# Altium PCB disp4x7seg.PcbDoc
Units mil, origin at the board's own origin, x right, y up, seen from the top; angles counter-clockwise.
Board outline 1200 x 600 mil, 2 copper layers (Top Layer, Bottom Layer), stack 65.792 mil thick; 6 components, 12 nets, 52 pads, 0 vias.
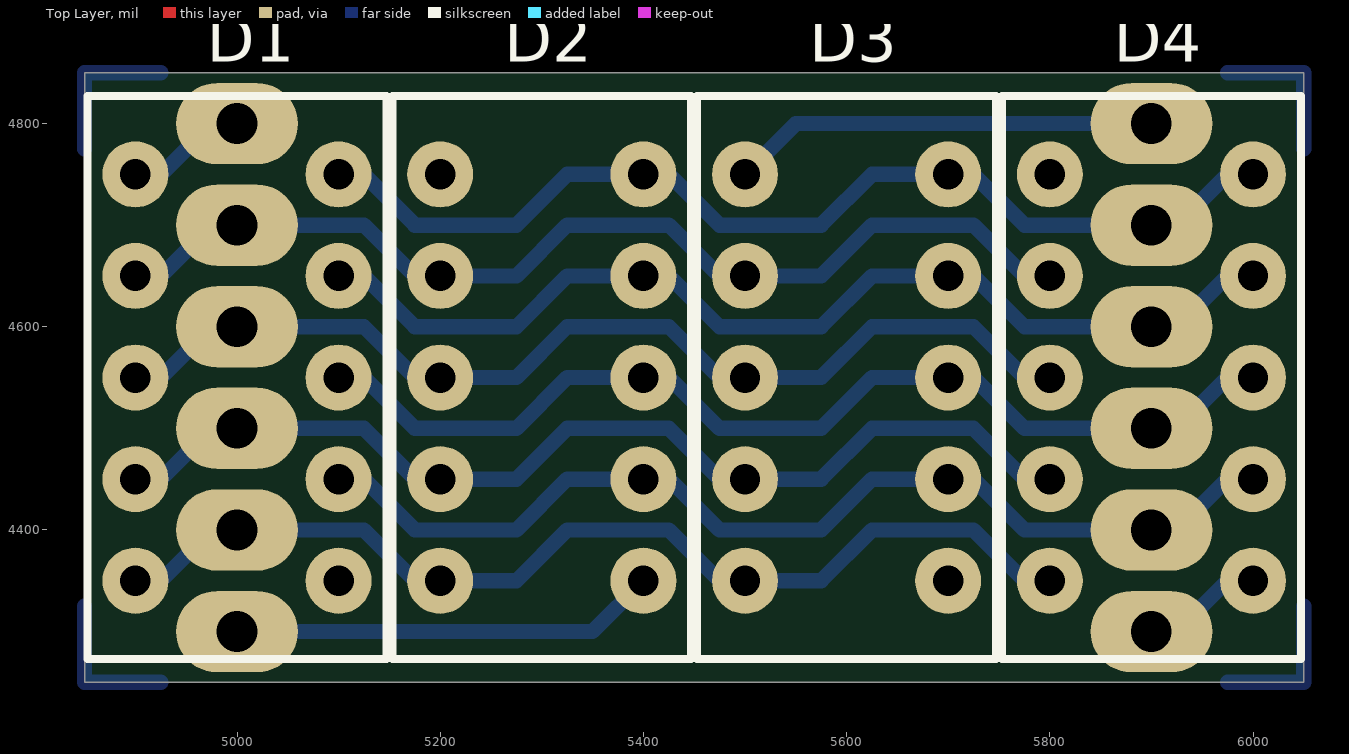
[diagram p0: Top Layer view]
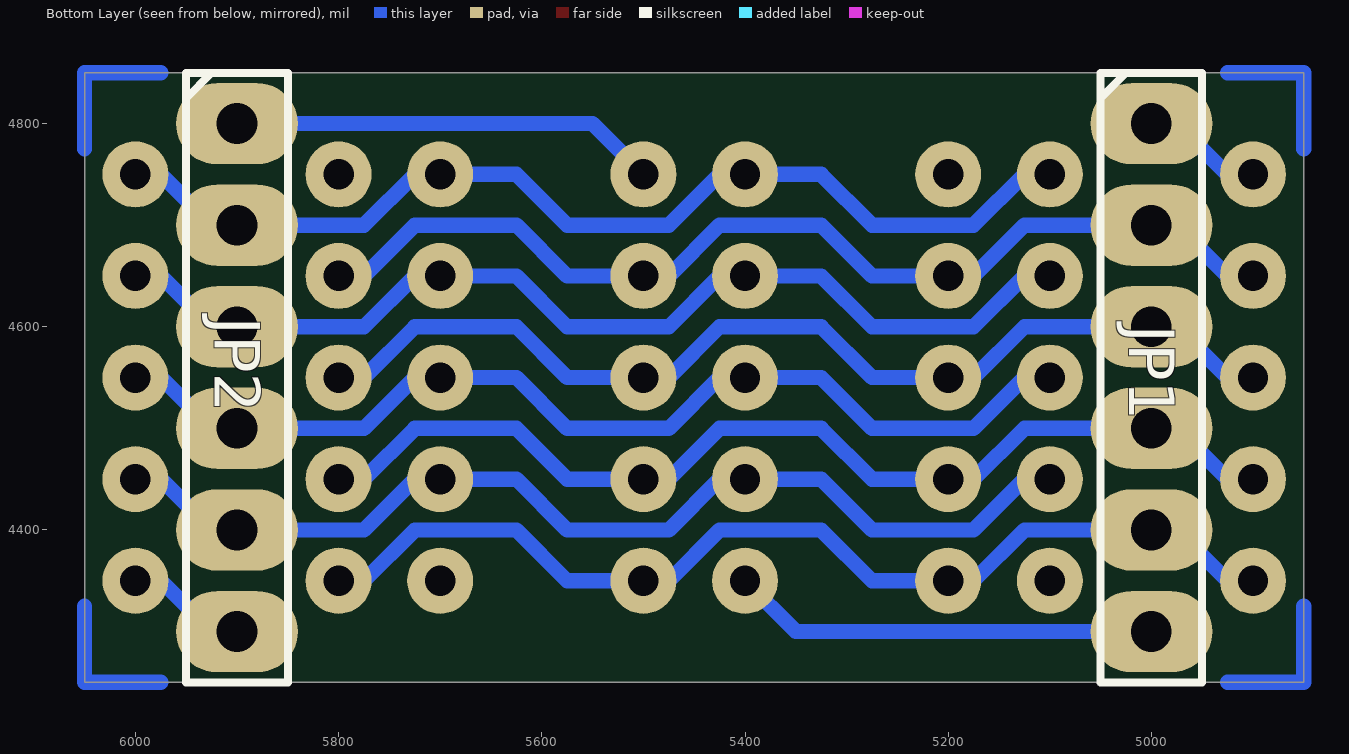
[diagram p1: Bottom Layer view, seen from below]
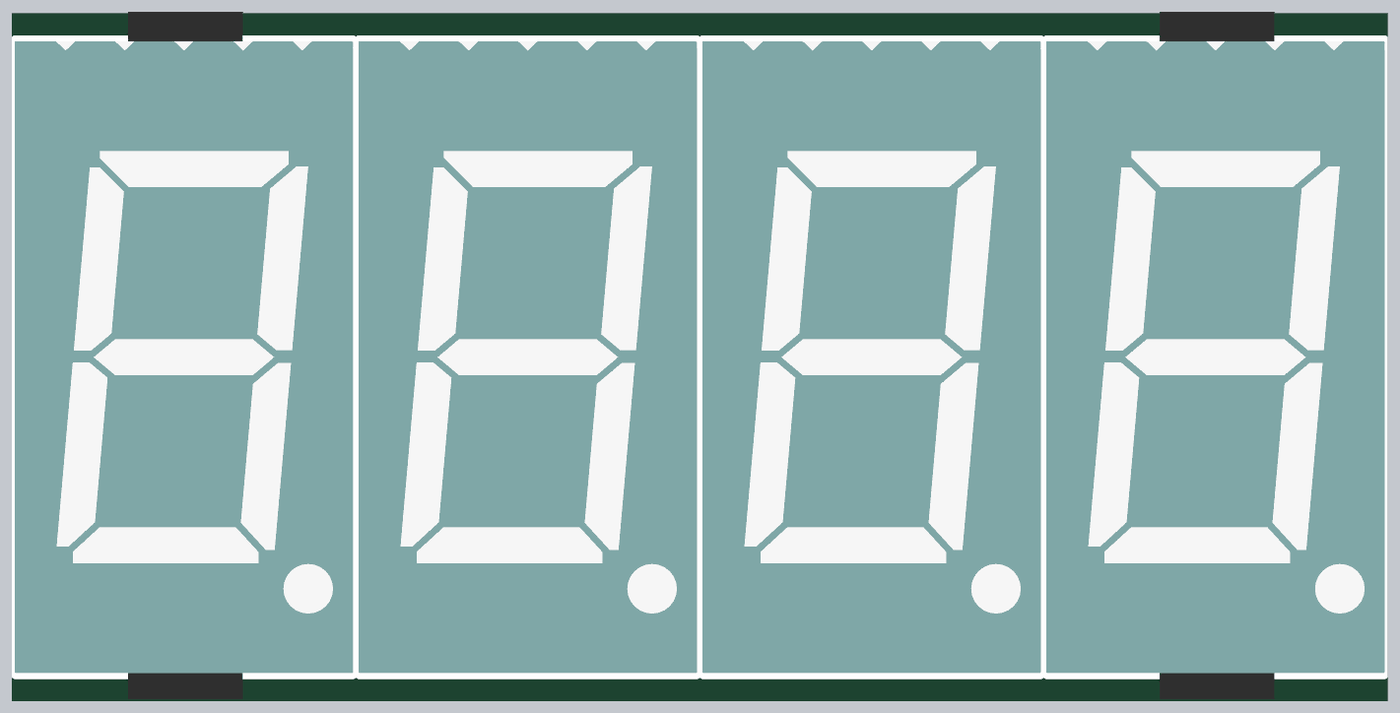
[diagram p2: 3D render of the assembled board from above, using the file's embedded part models]

## Layer stack, top to bottom
Top Layer: signal copper 1.4
Dielectric: core 62.9921, FR-4, Dk 4.8
Bottom Layer: signal copper 1.4

## Board outline
4850,4250 6050,4250 6050,4850 4850,4850

## Design rules (kind name [scope] priority, off if disabled: settings)
Clearance [All] p1: gap=10
PolygonConnect [All] p1: connectstyle=Relief reliefconductorwidth=10 reliefentries=4 polygonreliefangle="90 Angle"
RoutingVias [All] p1: holewidth=28 width=50 viastyle="Through Hole" minholewidth=28 minwidth=50 maxholewidth=28 maxwidth=50
SilkscreenOverComponentPads [All] p1: minsilkscreentomaskgap=10
SolderMaskExpansion [All] p1: expansion=4
Width [All] p1: maxlimit=15 minlimit=10 preferedwidth=10
27 further rules are at their usual default settings.

## Components (designator, comment, footprint, x,y, rotation, side; value= is the part's Value field where it differs from the comment)
D1 "DA361H" DISP7_2 5200,4550 r0 top
D2 "DA361H" DISP7_2 5500,4550 r0 top
D3 "DA361H" DISP7_2 5800,4550 r0 top
D4 "DA361H" DISP7_2 6100,4550 r0 top
JP1 "Header6x1" HDR6X1 5000,4800 r270 bottom
JP2 "Header6x1" HDR6X1 5900,4800 r270 bottom

## Footprints (in the part's own frame and the unit in brackets; to place one, negate y for a bottom-side part, rotate by r counter-clockwise, add the part's x,y. Pads: shape width x height; smd on the part's side, far side on the other; paste and mask are expansions set on the pad)
DISP7_2 [mil] "DISPLAY 7 SEGMENTOS"
  round 65 hole 30: 1(-300,200) 2(-300,100) 3(-300,0) 4(-300,-100) 5(-300,-200) 6(-100,-200) 7(-100,-100) 8(-100,0) 9(-100,100) 10(-100,200)
  silkscreen extent -347,-277 -53,277, body extent -348,-276 -52,276, height 401
HDR6X1 [mil] "HEADER 6x1"
  oval 80x120 hole 40: 1(0,0) 2(100,0) 3(200,0) 4(300,0) 5(400,0) 6(500,0)
  silkscreen extent -50,-50 550,50, body extent -51,-51 549,49, height 161

## Part data
D1 D2 D3 D4: library part "Display 7 Segmentos Rojo; Anodo Comun; 0.36in; DA361H"
JP1 JP2: "Header 6x1"

## Nets (pads, with @x,y where several pads share a name; then routed paths per layer and width w, separated by ;. In a path a pad name is that pad's centre, name@x,y a point inside that pad or via, vN(x,y) a via of type N, cw(c..) or ccw(c..) an arc to the next point about the centre after c; other vN are vias at no path point)
A: D1.10 D2.10 D3.10 D4.10 JP2.2 | length 1149.3
  Bottom Layer w15: D1.10 5125,4750 5175,4700 5275,4700 5325,4750 D2.10 5425,4750 5475,4700 5575,4700 5625,4750 D3.10 5725,4750 5775,4700 ; D4.10 5975,4750 5925,4700 JP2.2 5875,4700 5775,4700 ; 5775,4700 5837.5,4700 5775,4700
A0: D4.6 JP2.6 | length 145.7
  Bottom Layer w15: JP2.6@5875,4300 JP2.6 5925,4300 5975,4350 D4.6
A1: D3.1 JP2.1 | length 420.7
  Bottom Layer w15: D3.1 5550,4800 JP2.1
A2: D2.6 JP1.6 | length 420.7
  Bottom Layer w15: JP1.6 5350,4300 D2.6
A3: D1.1 JP1.1 | length 145.7
  Bottom Layer w15: D1.1 4925,4750 4975,4800 JP1.1 JP1.1@5025,4800
B: D1.9 D2.9 D3.9 D4.9 JP2.3 | length 1149.3
  Bottom Layer w15: D1.9 5125,4650 5175,4600 5275,4600 5325,4650 D2.9 5425,4650 5475,4600 5575,4600 5625,4650 D3.9 5725,4650 5775,4600 ; D4.9 5975,4650 5925,4600 JP2.3 5875,4600 5775,4600 ; 5775,4600 5837.5,4600 5775,4600
C: D1.8 D2.8 D3.8 D4.8 JP2.4 | length 1124.3
  Bottom Layer w15: D1.8 5125,4550 5175,4500 5275,4500 5325,4550 D2.8 ; D2.8@5425,4550 5475,4500 5575,4500 5625,4550 D3.8 5725,4550 5775,4500 ; D4.8 5975,4550 5925,4500 JP2.4 5875,4500 5775,4500 ; 5775,4500 5837.5,4500 5775,4500
D: D1.5 D2.5 D3.5 D4.5 JP1.5 | length 1124.3
  Bottom Layer w15: D1.5 4925,4350 4975,4400 JP1.5 5025,4400 5125,4400 ; 5062.5,4400 5125,4400 ; D4.5@5787.5,4350 D4.5 ; 5125,4400 5175,4350 D2.5 5275,4350 5325,4400 5425,4400 5475,4350 D3.5 5575,4350 5625,4400 5725,4400 D4.5@5775,4350 ; D4.5@5775,4350 D4.5 ; D4.5@5775,4350 D4.5
DP: D1.7 D2.7 D3.7 D4.7 JP2.5 | length 1149.3
  Bottom Layer w15: D1.7 5125,4450 5175,4400 5275,4400 5325,4450 D2.7 5425,4450 5475,4400 5575,4400 5625,4450 D3.7 5725,4450 5775,4400 ; D4.7 5975,4450 5925,4400 JP2.5 5875,4400 5775,4400 ; 5775,4400 5837.5,4400 5775,4400
E: D1.4 D2.4 D3.4 D4.4 JP1.4 | length 1124.3
  Bottom Layer w15: D1.4 4925,4450 4975,4500 JP1.4 5025,4500 5125,4500 ; 5062.5,4500 5125,4500 ; D4.4@5787.5,4450 D4.4 ; 5125,4500 5175,4450 D2.4 5275,4450 5325,4500 5425,4500 5475,4450 D3.4 5575,4450 5625,4500 5725,4500 D4.4@5775,4450 ; D4.4@5775,4450 D4.4 ; D4.4@5775,4450 D4.4
F: D1.2 D2.2 D3.2 D4.2 JP1.2 | length 1124.3
  Bottom Layer w15: D1.2 4925,4650 4975,4700 JP1.2 5025,4700 5125,4700 ; 5062.5,4700 5125,4700 ; D4.2@5787.5,4650 D4.2 ; 5125,4700 5175,4650 D2.2 5275,4650 5325,4700 5425,4700 5475,4650 D3.2 5575,4650 5625,4700 5725,4700 D4.2@5775,4650 ; D4.2@5775,4650 D4.2 ; D4.2@5775,4650 D4.2
G: D1.3 D2.3 D3.3 D4.3 JP1.3 | length 1099.3
  Bottom Layer w15: D1.3 4925,4550 4975,4600 JP1.3 5025,4600 5125,4600 ; 5062.5,4600 5125,4600 ; D4.3@5787.5,4550 D4.3 5775,4550 5725,4600 5625,4600 5575,4550 5475,4550 5425,4600 5325,4600 5275,4550 5175,4550 5125,4600
pads on no net: D1.6 D2.1 D3.6 D4.1
copper on no net: | length 637.5
  Bottom Layer w15: 4850,4325 4850,4250 4925,4250 ; 4850,4775 4850,4850 4925,4850 ; 5100,4350 5112.5,4350 ; 5975,4250 6050,4250 6050,4325 ; 5975,4850 6050,4850 6050,4775 ; 5787.5,4750 5800,4750 5787.5,4750

## Silkscreen, mask and mechanical layers (free items; w line width, h text height)
borderPcb:
  the board outline again, w10
topOverlayAux:
  circle w10: c6000,5500 r27.95
  circle w10: c5900,5500 r27.95
  circle w10: c5300,5512.5 r27.95
  circle w10: c5200,5512.5 r27.95
  circle w10: c5100,5512.5 r27.95
  circle w10: c5000,5512.5 r27.95
  circle w10: c5000,5412.5 r27.95
  circle w10: c5000,5312.5 r27.95
  circle w10: c5000,5212.5 r27.95
  circle w10: c5000,5012.5 r27.95
  circle w10: c5000,5112.5 r27.95
  lines w10: 4850,4937.5 5087.5,4937.5 5087.5,5412.5 6050,5412.5 6050,4862.5 ; 4962.5,5012.5 5000,5012.5 ; 4962.5,5112.5 5000,5112.5 5037.5,5112.5 ; 4962.5,5212.5 5000,5212.5 5037.5,5212.5 ; 4962.5,5312.5 5000,5312.5 5037.5,5312.5 ; 4962.5,5412.5 5000,5412.5 5037.5,5412.5 ; 4962.5,5550 5000,5512.5 ; 5000,4975 5000,5012.5 ; 5037.5,5012.5 5000,5012.5 ; 5037.5,5475 5000,5512.5 ; 5100,5475 5100,5512.5 5100,5550 ; 5200,5475 5200,5512.5 5200,5550 ; 5300,5475 5300,5512.5 ; 5300,5550 5300,5512.5 ; 5337.5,5512.5 5300,5512.5 ; 5862.5,5500 5900,5500 ; 5900,5462.5 5900,5500 ; 5900,5537.5 5900,5500 ; 5937.5,5500 5900,5500 ; 5962.5,5500 6000,5500 ; 6000,5462.5 6000,5500 ; 6000,5537.5 6000,5500 ; 6037.5,5500 6000,5500 ; 5000,5012.5 5000,5512.5 ; 5000,5512.5 5300,5512.5